# EAGLE board shield EBO (EAGLE 9.1.0)
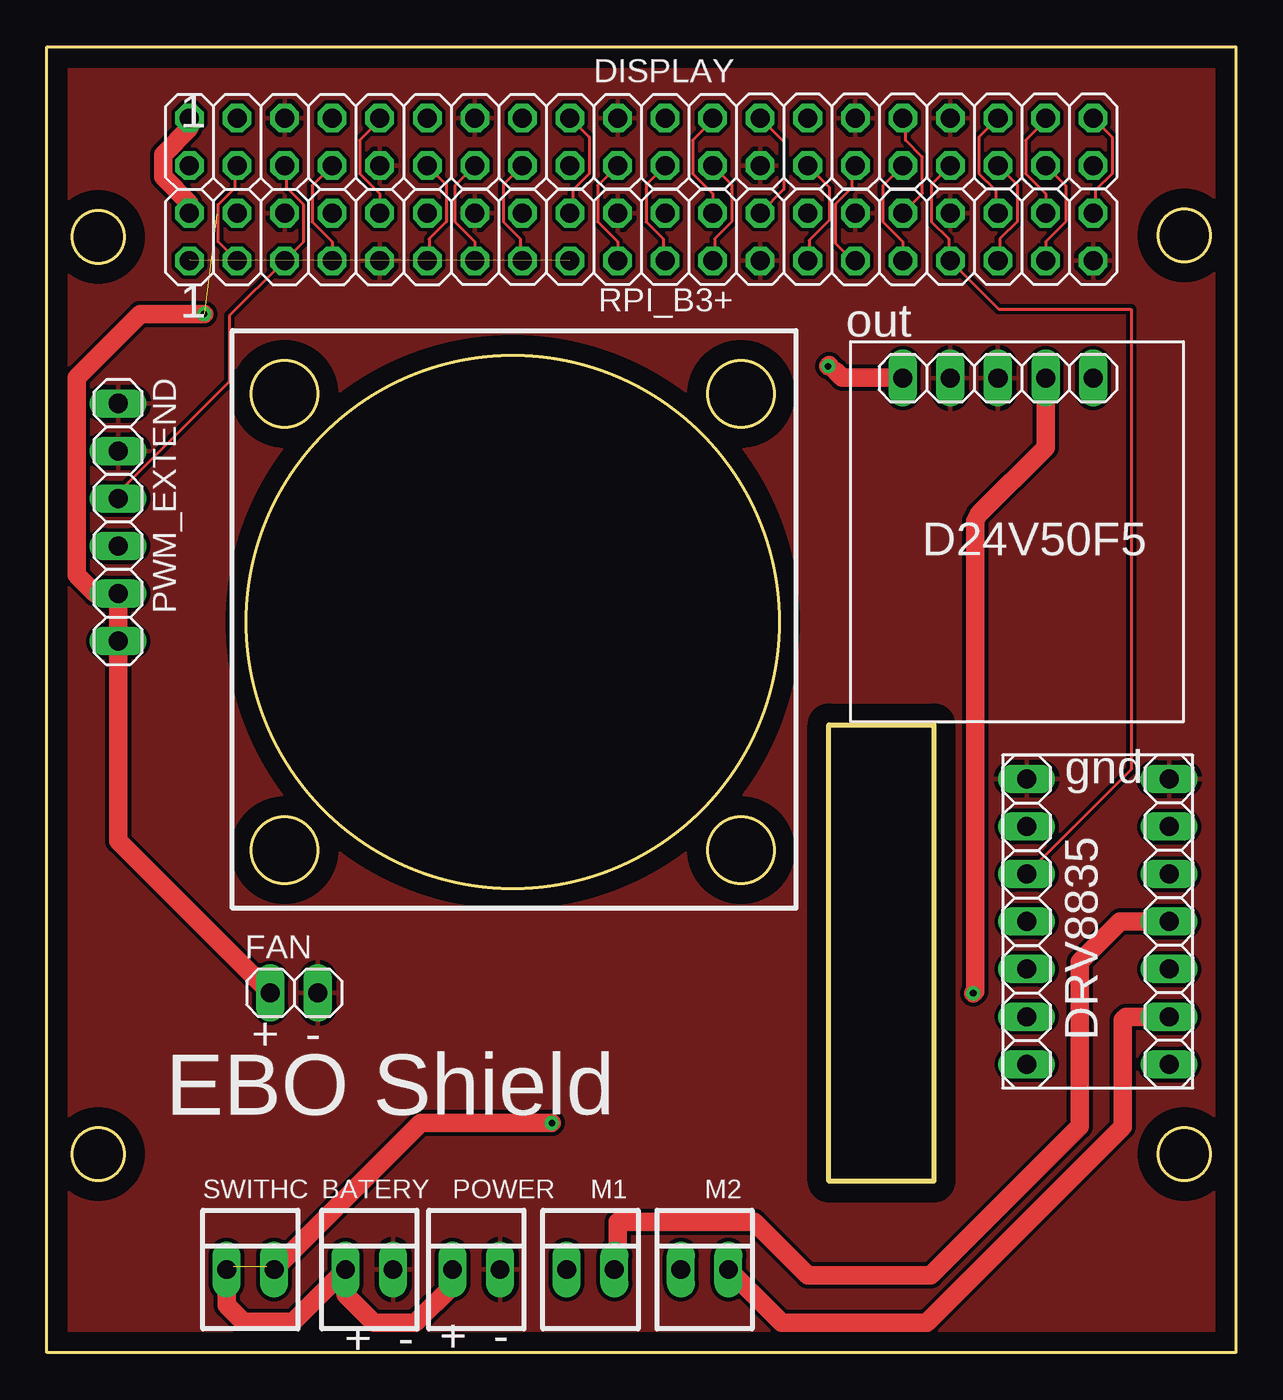
[diagram p0: board, top side]
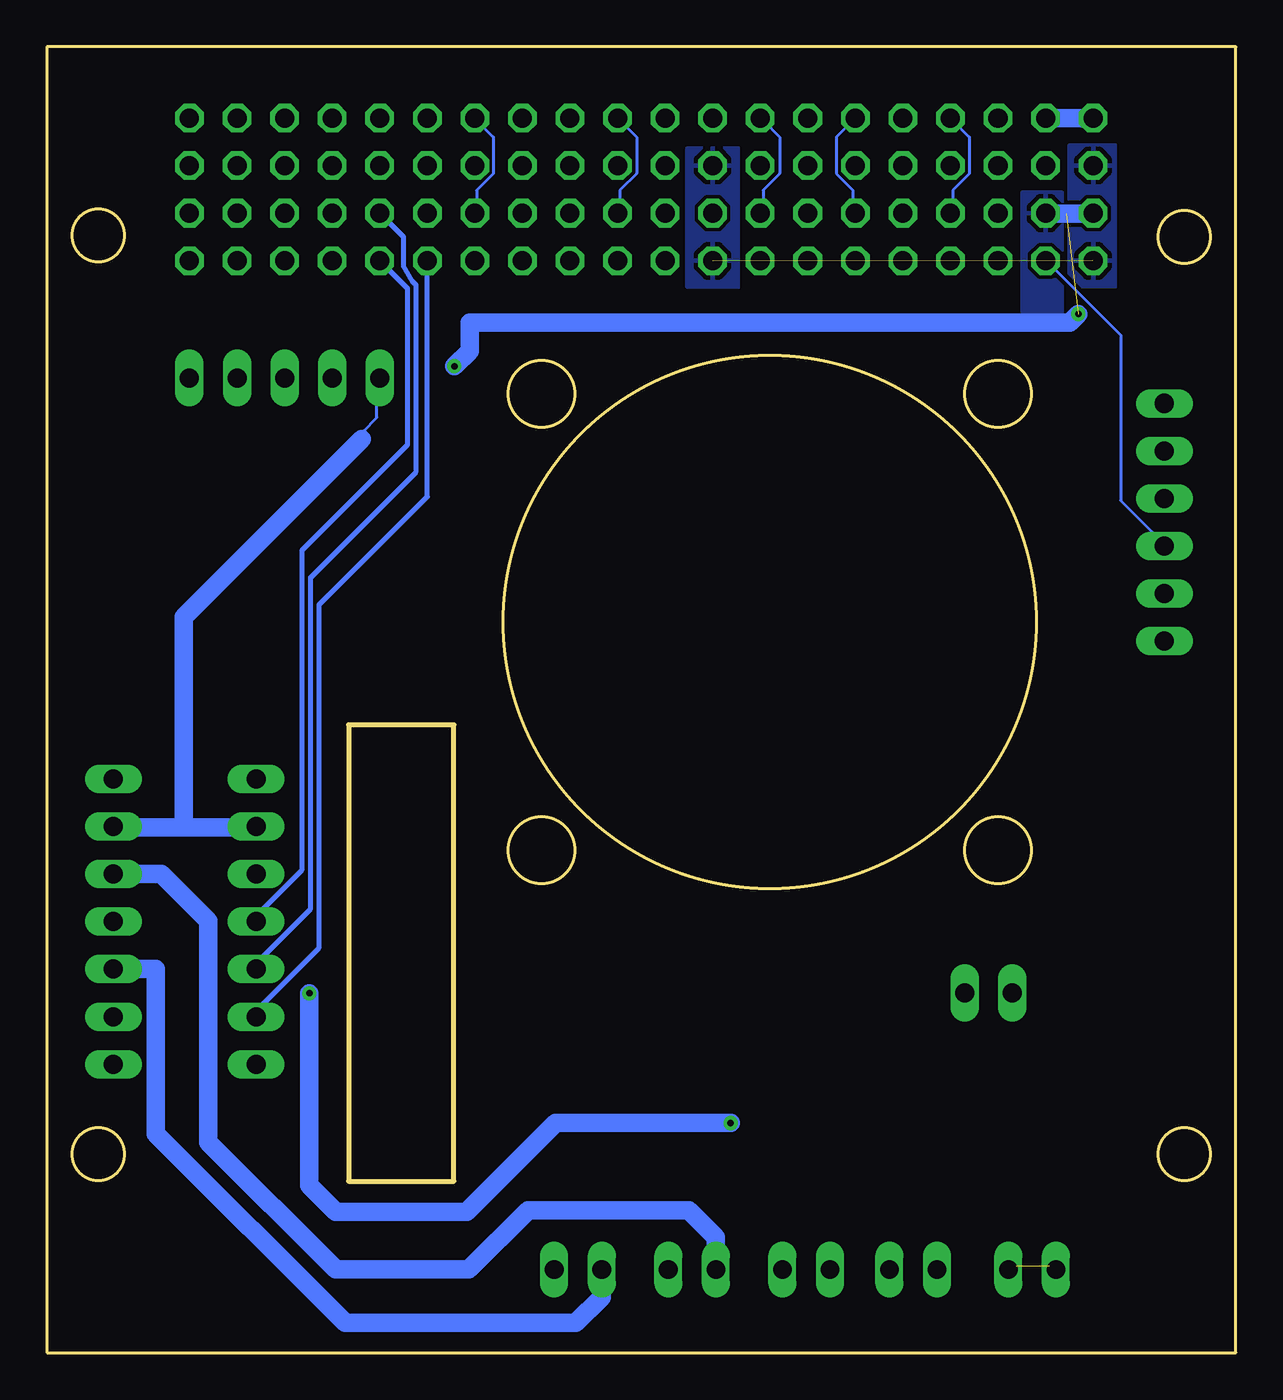
[diagram p1: board, bottom side, seen from below]

Size 63.5 x 69.77 mm. Coordinates in mm from the lower left corner, seen from the top.
Outline: 0,0 0,69.77 63.5,69.77 63.5,0 0,0
Outline: 41.76,9.16 41.76,33.54 47.38,33.54 47.38,9.16 41.76,9.16
Outline: circle at 2.75,10.61 radius 1.4
Outline: circle at 60.75,59.69 radius 1.4
Outline: circle at 60.75,10.61 radius 1.4
Outline: circle at 24.89,39.04 radius 14.23
Outline: circle at 12.7,26.84 radius 1.78
Outline: circle at 12.7,51.23 radius 1.78
Outline: circle at 37.08,51.23 radius 1.78
Outline: circle at 37.08,26.84 radius 1.78
Outline: circle at 2.75,59.61 radius 1.4
Copper layers (1*16): Top 0.035mm / dielectric 1.5mm / Bottom 0.035mm
Design rules "default *": minimum track width 6mil, minimum drill 0.35mm, track to track 8mil, track to pad 6mil, pad to pad 6mil, via to via 6mil, smd to smd 6mil, copper to edge 40mil, drill to drill 6mil, minimum pad ring 10mil, minimum via ring 8mil, stop-mask expansion 4mil, vias tented up to drill 0mil, thermal gap 10mil

## Footprints (pad centres in the part's own frame; a part is rotated, then mirrored left to right if it is on the bottom)
22-23-2021 = drill 1 long: 1 -1.27,0; 2 1.27,0
1X05 = drill 1.016 long: 1 -5.08,0; 2 -2.54,0; 3 0,0; 4 2.54,0; 5 5.08,0
2X20 = drill 1.016 octagon: 1 -24.13,-1.27; 2 -24.13,1.27; 3 -21.59,-1.27; 4 -21.59,1.27; 5 -19.05,-1.27; 6 -19.05,1.27; 7 -16.51,-1.27; 8 -16.51,1.27; 9 -13.97,-1.27; 10 -13.97,1.27; 11 -11.43,-1.27; 12 -11.43,1.27; 13 -8.89,-1.27; 14 -8.89,1.27; 15 -6.35,-1.27; 16 -6.35,1.27; 17 -3.81,-1.27; 18 -3.81,1.27; 19 -1.27,-1.27; 20 -1.27,1.27; 21 1.27,-1.27; 22 1.27,1.27; 23 3.81,-1.27; 24 3.81,1.27; 25 6.35,-1.27; 26 6.35,1.27; 27 8.89,-1.27; 28 8.89,1.27; 29 11.43,-1.27; 30 11.43,1.27; 31 13.97,-1.27; 32 13.97,1.27; 33 16.51,-1.27; 34 16.51,1.27; 35 19.05,-1.27; 36 19.05,1.27; 37 21.59,-1.27; 38 21.59,1.27; 39 24.13,-1.27; 40 24.13,1.27
1X02 = drill 1.016 long: 1 -1.27,0; 2 1.27,0
1X07 = drill 1.016 long: 1 -7.62,0; 2 -5.08,0; 3 -2.54,0; 4 0,0; 5 2.54,0; 6 5.08,0; 7 7.62,0
1X06 = drill 1.016 long: 1 -6.35,0; 2 -3.81,0; 3 -1.27,0; 4 1.27,0; 5 3.81,0; 6 6.35,0

## Placement (x,y rotation side)
BATERY  [22-23-2021]  17.23,4.45 0 top
DC-DC  [1X05]  50.8,52.07 0 top
DISPLAY  [2X20]  31.75,64.69 0 top
FAN  [1X02]  13.21,19.22 0 top
GND^  [1X07]  59.94,23.03 270 top
M1  [22-23-2021]  29.04,4.45 0 top
M2  [22-23-2021]  35.13,4.45 0 top
POWER  [22-23-2021]  22.94,4.45 0 top
PWM_EXTEND  [1X06]  3.81,44.37 270 top
RPI_B3+  [2X20]  31.75,59.61 0 top
SWITHC  [22-23-2021]  10.88,4.45 0 top
V_MODE  [1X07]  52.32,23.03 90 top

## Library data of the parts
BATERY M1 M2 POWER SWITHC = con-molex
DC-DC DISPLAY FAN GND^ PWM_EXTEND RPI_B3+ V_MODE = pinhead

## Nets
3.3V: DISPLAY.1 DISPLAY.17 RPI_B3+.1 RPI_B3+.17
5V: DC-DC.1 DISPLAY.2 DISPLAY.4 FAN.1 GND^.2 PWM_EXTEND.5 PWM_EXTEND.6 RPI_B3+.2 RPI_B3+.4 V_MODE.6
7.4V: BATERY.1 DC-DC.4 POWER.1 SWITHC.1 SWITHC.2
AOUT1: GND^.6 M2.2
AOUT2: GND^.5 M2.1
BOUT1: GND^.4 M1.2
BOUT2: GND^.3 M1.1
GND: BATERY.2 DC-DC.2 DC-DC.3 DISPLAY.6 DISPLAY.9 DISPLAY.14 DISPLAY.20 DISPLAY.25 DISPLAY.30 DISPLAY.34 FAN.2 GND^.1 POWER.2 PWM_EXTEND.1 PWM_EXTEND.2 RPI_B3+.6 RPI_B3+.9 RPI_B3+.14 RPI_B3+.20 RPI_B3+.25 RPI_B3+.30 RPI_B3+.34 RPI_B3+.39 V_MODE.7
GPIO2: DISPLAY.3 PWM_EXTEND.4 RPI_B3+.3
GPIO3: DISPLAY.5 PWM_EXTEND.3 RPI_B3+.5
GPIO4: DISPLAY.7 RPI_B3+.7
GPIO5: DISPLAY.29 RPI_B3+.29 V_MODE.2
GPIO6: DISPLAY.31 RPI_B3+.31 V_MODE.4
GPIO7: DISPLAY.26 RPI_B3+.26
GPIO8: DISPLAY.24 RPI_B3+.24
GPIO9: DISPLAY.21 RPI_B3+.21
GPIO10: DISPLAY.19 RPI_B3+.19
GPIO11: DISPLAY.23 RPI_B3+.23
GPIO12: DISPLAY.32 RPI_B3+.32 V_MODE.3
GPIO13: DISPLAY.33 RPI_B3+.33 V_MODE.5
GPIO16: DISPLAY.36 RPI_B3+.36
GPIO17: DISPLAY.11 RPI_B3+.11
GPIO18: DISPLAY.12 RPI_B3+.12
GPIO19: DISPLAY.35 RPI_B3+.35
GPIO20: DISPLAY.38 RPI_B3+.38
GPIO21: DISPLAY.40 RPI_B3+.40
GPIO22: DISPLAY.15 RPI_B3+.15
GPIO23: DISPLAY.16 RPI_B3+.16
GPIO24: DISPLAY.18 RPI_B3+.18
GPIO25: DISPLAY.22 RPI_B3+.22
GPIO26: DISPLAY.37 RPI_B3+.37
GPIO27: DISPLAY.13 RPI_B3+.13
RESERV1: DISPLAY.27 RPI_B3+.27
RESERV2: DISPLAY.28 RPI_B3+.28
RX: DISPLAY.10 RPI_B3+.10
TX: DISPLAY.8 RPI_B3+.8

## Tracks (layer width: path | path; a pad name or v marks a point on that pad's centre or on a via)
3.3V  (1 unrouted)
  Bottom 0.152: 7.64,58.37 RPI_B3+.1
  pour Bottom: 26.54,64.36 29.29,64.36 29.34,64.31 29.34,56.95 29.31,56.92 26.54,56.92
  pour Bottom: 6.43,56.92 8.89,56.92 8.89,64.54 6.43,64.54
5V  (via drill 0.35)  (1 unrouted)
  Top 0.152: 3.81,40.46 PWM_EXTEND.5 | 45.7,52.09 DC-DC.1 | 42.14,52.45 41.78,52.75
  Top 1: 3.81,40.46 PWM_EXTEND.6 3.81,27.35 FAN.1 | v8.4,55.5 5.02,55.5 5,55.48 1.6,52.08 1.6,41.55 2.59,40.56 PWM_EXTEND.5 | v41.73,52.7 41.78,52.75 | DISPLAY.2 7.62,65.42 6.21,64.01 6.21,62.83 7.62,61.42 RPI_B3+.2 | 45.7,52.09 42.49,52.09 42.14,52.45
  Bottom 0.152: 59.89,28.11 GND^.2 | 10.13,60.86 RPI_B3+.4 | 7.64,60.86 RPI_B3+.2 | DC-DC.1 45.87,51.92 45.87,49.96 46.58,49.25 46.69,48.8
  Bottom 1: 7.64,60.86 9.07,60.86 10.13,60.86 | DISPLAY.2 DISPLAY.4 | v41.73,52.7 40.92,53.52 40.92,55.04 8.86,55.04 v8.4,55.5 | 56.19,28.07 56.19,39.3 46.69,48.8 | 56.19,28.07 52.37,28.07 V_MODE.6 | 56.19,28.07 59.85,28.07 59.89,28.11
  pour Bottom: 11.23,62.03 9.27,62.03 9.27,56.79 9.27,54.64 11.4,54.64 11.4,56.82 11.4,62.03
7.4V  (via drill 0.35)  (1 unrouted)
  Top 0.152: 53.34,51.92 DC-DC.4 | 11.73,4.62 SWITHC.2 | 9.96,4.62 SWITHC.1
  Top 0.254: 15.96,3.81 BATERY.1
  Top 1: SWITHC.2 19.97,12.27 v26.98,12.27 | SWITHC.1 9.61,2.54 10.5,1.64 13.15,1.64 BATERY.1 15.96,3.1 17.46,1.59 19.68,1.59 21.67,3.58 POWER.1 | v49.48,19.2 49.59,19.31 49.59,44.43 49.78,44.81 53.34,48.36 53.34,51.92
  Bottom 1: v26.98,12.27 36.33,12.27 41.08,7.52 48.06,7.52 49.48,8.93 v49.48,19.2
AOUT1
  Top 1: M2.2 39.26,1.59 46.99,1.59 57.47,12.07 57.47,17.78 57.64,17.95 GND^.6
AOUT2
  Bottom 1: M2.1 33.86,2.97 35.24,1.59 47.57,1.59 57.69,11.71 57.69,20.49 GND^.5
BOUT1
  Top 1: M1.2 30.48,4.62 30.48,6.99 37.78,6.99 40.64,4.13 47.2,4.13 55.17,12.1 55.17,20.88 57.32,23.03 GND^.4
BOUT2
  Bottom 1: M1.1 27.77,6.18 29.21,7.62 37.78,7.62 40.96,4.45 48.07,4.45 54.88,11.25 54.88,23.07 57.38,25.57 GND^.3
GND
  pour Top: 0.64,0.64 62.87,0.64 62.87,69.14 0.64,69.14
GPIO2
  Top 0.152: DISPLAY.3 10.06,63.42 10.06,62.25 9.14,61.34 9.14,59.36 10.06,58.44 RPI_B3+.3
  Bottom 0.152: PWM_EXTEND.4 3.81,43.2 6.15,45.54 6.15,54.38 10.06,58.29 RPI_B3+.3
GPIO3
  Top 0.152: PWM_EXTEND.3 3.81,45.95 9.75,51.89 9.75,55.39 12.65,58.29 RPI_B3+.5 12.8,58.44 13.72,59.36 13.72,61.34 12.8,62.25 12.8,63.42 DISPLAY.5
GPIO4
  Top 0.152: DISPLAY.7 14.17,62.35 14.17,60.42 15.24,59.36 15.24,58.44 RPI_B3+.7
GPIO5
  Top 0.152: DISPLAY.29 43.03,63.35 43.03,62.28 42.14,61.39 42.14,59.26 43.03,58.37 RPI_B3+.29
  Bottom 0.254: V_MODE.2 52.32,18.26 48.95,21.63 48.95,39.96 43.18,45.73 RPI_B3+.29
GPIO6
  Top 0.152: DISPLAY.31 44.65,62.35 44.65,60.42 45.72,59.36 45.72,58.44 RPI_B3+.31
  Bottom 0.254: 44.23,56.85 RPI_B3+.31 | V_MODE.4 52.32,23.34 49.87,25.8 49.87,42.88 44.23,48.51 44.23,56.85 | 44.23,56.85
GPIO7
  Top 0.152: DISPLAY.26 39.37,64.69 39.37,62.15 RPI_B3+.26
GPIO8
  Top 0.152: RPI_B3+.24 35.56,61.04 35.56,61.92 34.49,62.99 34.49,64.77 35.56,65.84 DISPLAY.24
GPIO9
  Top 0.152: RPI_B3+.21 32.92,58.44 32.92,59.51 32,60.42 32,62.15 32,62.4 DISPLAY.21
GPIO10
  Top 0.152: DISPLAY.19 29.41,62.35 29.41,60.42 30.48,59.36 30.48,58.44 RPI_B3+.19
GPIO11
  Top 0.152: RPI_B3+.23 35.66,58.44 35.66,59.51 36.58,60.42 36.58,62.15 36.58,62.4 DISPLAY.23
GPIO12
  Top 0.152: DISPLAY.32 45.87,65.84 45.87,64.77 46.76,63.88 46.76,61.92 45.87,61.04 RPI_B3+.32
  Bottom 0.254: RPI_B3+.32 44.45,59.61 44.45,58.02 43.98,57.25 43.78,57.04 43.78,47.05 49.41,41.42 49.41,23.71 52.32,20.8 V_MODE.3
GPIO13
  Top 0.152: V_MODE.5 57.91,31.16 57.91,55.75 50.85,55.75 RPI_B3+.33 48.16,58.44 48.16,59.51 47.24,60.42 47.24,62.15 47.24,62.4 DISPLAY.33
GPIO16
  Top 0.152: RPI_B3+.36 50.67,61.04 50.67,62.1 49.78,62.99 49.78,64.95 50.67,65.84 DISPLAY.36
GPIO17
  Top 0.152: RPI_B3+.11 20.42,58.44 20.42,59.51 21.34,60.42 21.34,62.15 21.34,62.4 DISPLAY.11
GPIO18
  Bottom 0.152: RPI_B3+.12 20.45,61.04 20.45,62.1 21.34,62.99 21.34,64.95 20.45,65.84 DISPLAY.12
GPIO19
  Top 0.152: RPI_B3+.35 50.9,58.44 50.9,59.51 51.82,60.42 51.82,62.15 51.82,62.4 DISPLAY.35
GPIO20
  Top 0.152: RPI_B3+.38 53.34,61.04 53.34,61.92 52.27,62.99 52.27,64.77 53.34,65.84 DISPLAY.38
GPIO21
  Top 0.152: RPI_B3+.40 56.01,61.04 56.01,62.1 56.9,62.99 56.9,64.95 56.01,65.84 DISPLAY.40
GPIO22
  Top 0.152: RPI_B3+.15 25.3,58.44 25.3,59.51 24.38,60.42 24.38,62.15 24.38,62.4 DISPLAY.15
GPIO23
  Bottom 0.152: RPI_B3+.16 25.25,61.04 25.25,62.1 24.36,62.99 24.36,64.95 25.25,65.84 DISPLAY.16
GPIO24
  Top 0.152: RPI_B3+.18 28.09,61.04 28.09,62.1 28.98,62.99 28.98,64.95 28.09,65.84 DISPLAY.18
GPIO25
  Bottom 0.152: RPI_B3+.22 32.89,61.04 32.89,62.1 32,62.99 32,64.95 32.89,65.84 DISPLAY.22
GPIO26
  Top 0.152: DISPLAY.37 54.41,62.35 54.41,60.42 53.34,59.36 53.34,58.44 RPI_B3+.37
GPIO27
  Top 0.152: DISPLAY.13 21.79,62.35 21.79,60.42 22.86,59.36 22.86,58.44 RPI_B3+.13
RESERV1
  Top 0.152: RPI_B3+.27 40.72,58.37 40.72,59.44 41.78,60.5 41.78,62.28 40.72,63.35 DISPLAY.27
RESERV2
  Bottom 0.152: RPI_B3+.28 40.54,61.04 40.54,62.1 39.65,62.99 39.65,64.95 40.54,65.84 DISPLAY.28
RX
  Top 0.152: RPI_B3+.10 17.78,61.04 17.78,61.92 16.71,62.99 16.71,64.77 17.78,65.84 DISPLAY.10
TX
  Bottom 0.152: RPI_B3+.8 15.11,61.04 15.11,62.1 14.22,62.99 14.22,64.95 15.11,65.84 DISPLAY.8

## Text on the board
tPlace: 1 | 1 | out | D24V50F5 | gnd | DRV8835 | + - | EBO Shield | + - | + -